# Altium PCB BACKUP_POWER.PcbDoc (part 1 of 2)
Units mm, origin at the board's own origin, x right, y up, seen from the top; angles counter-clockwise.
Board outline 100 x 100 mm, 2 copper layers (Top Layer, Bottom Layer); 154 components, 92 nets, 415 pads, 323 vias.
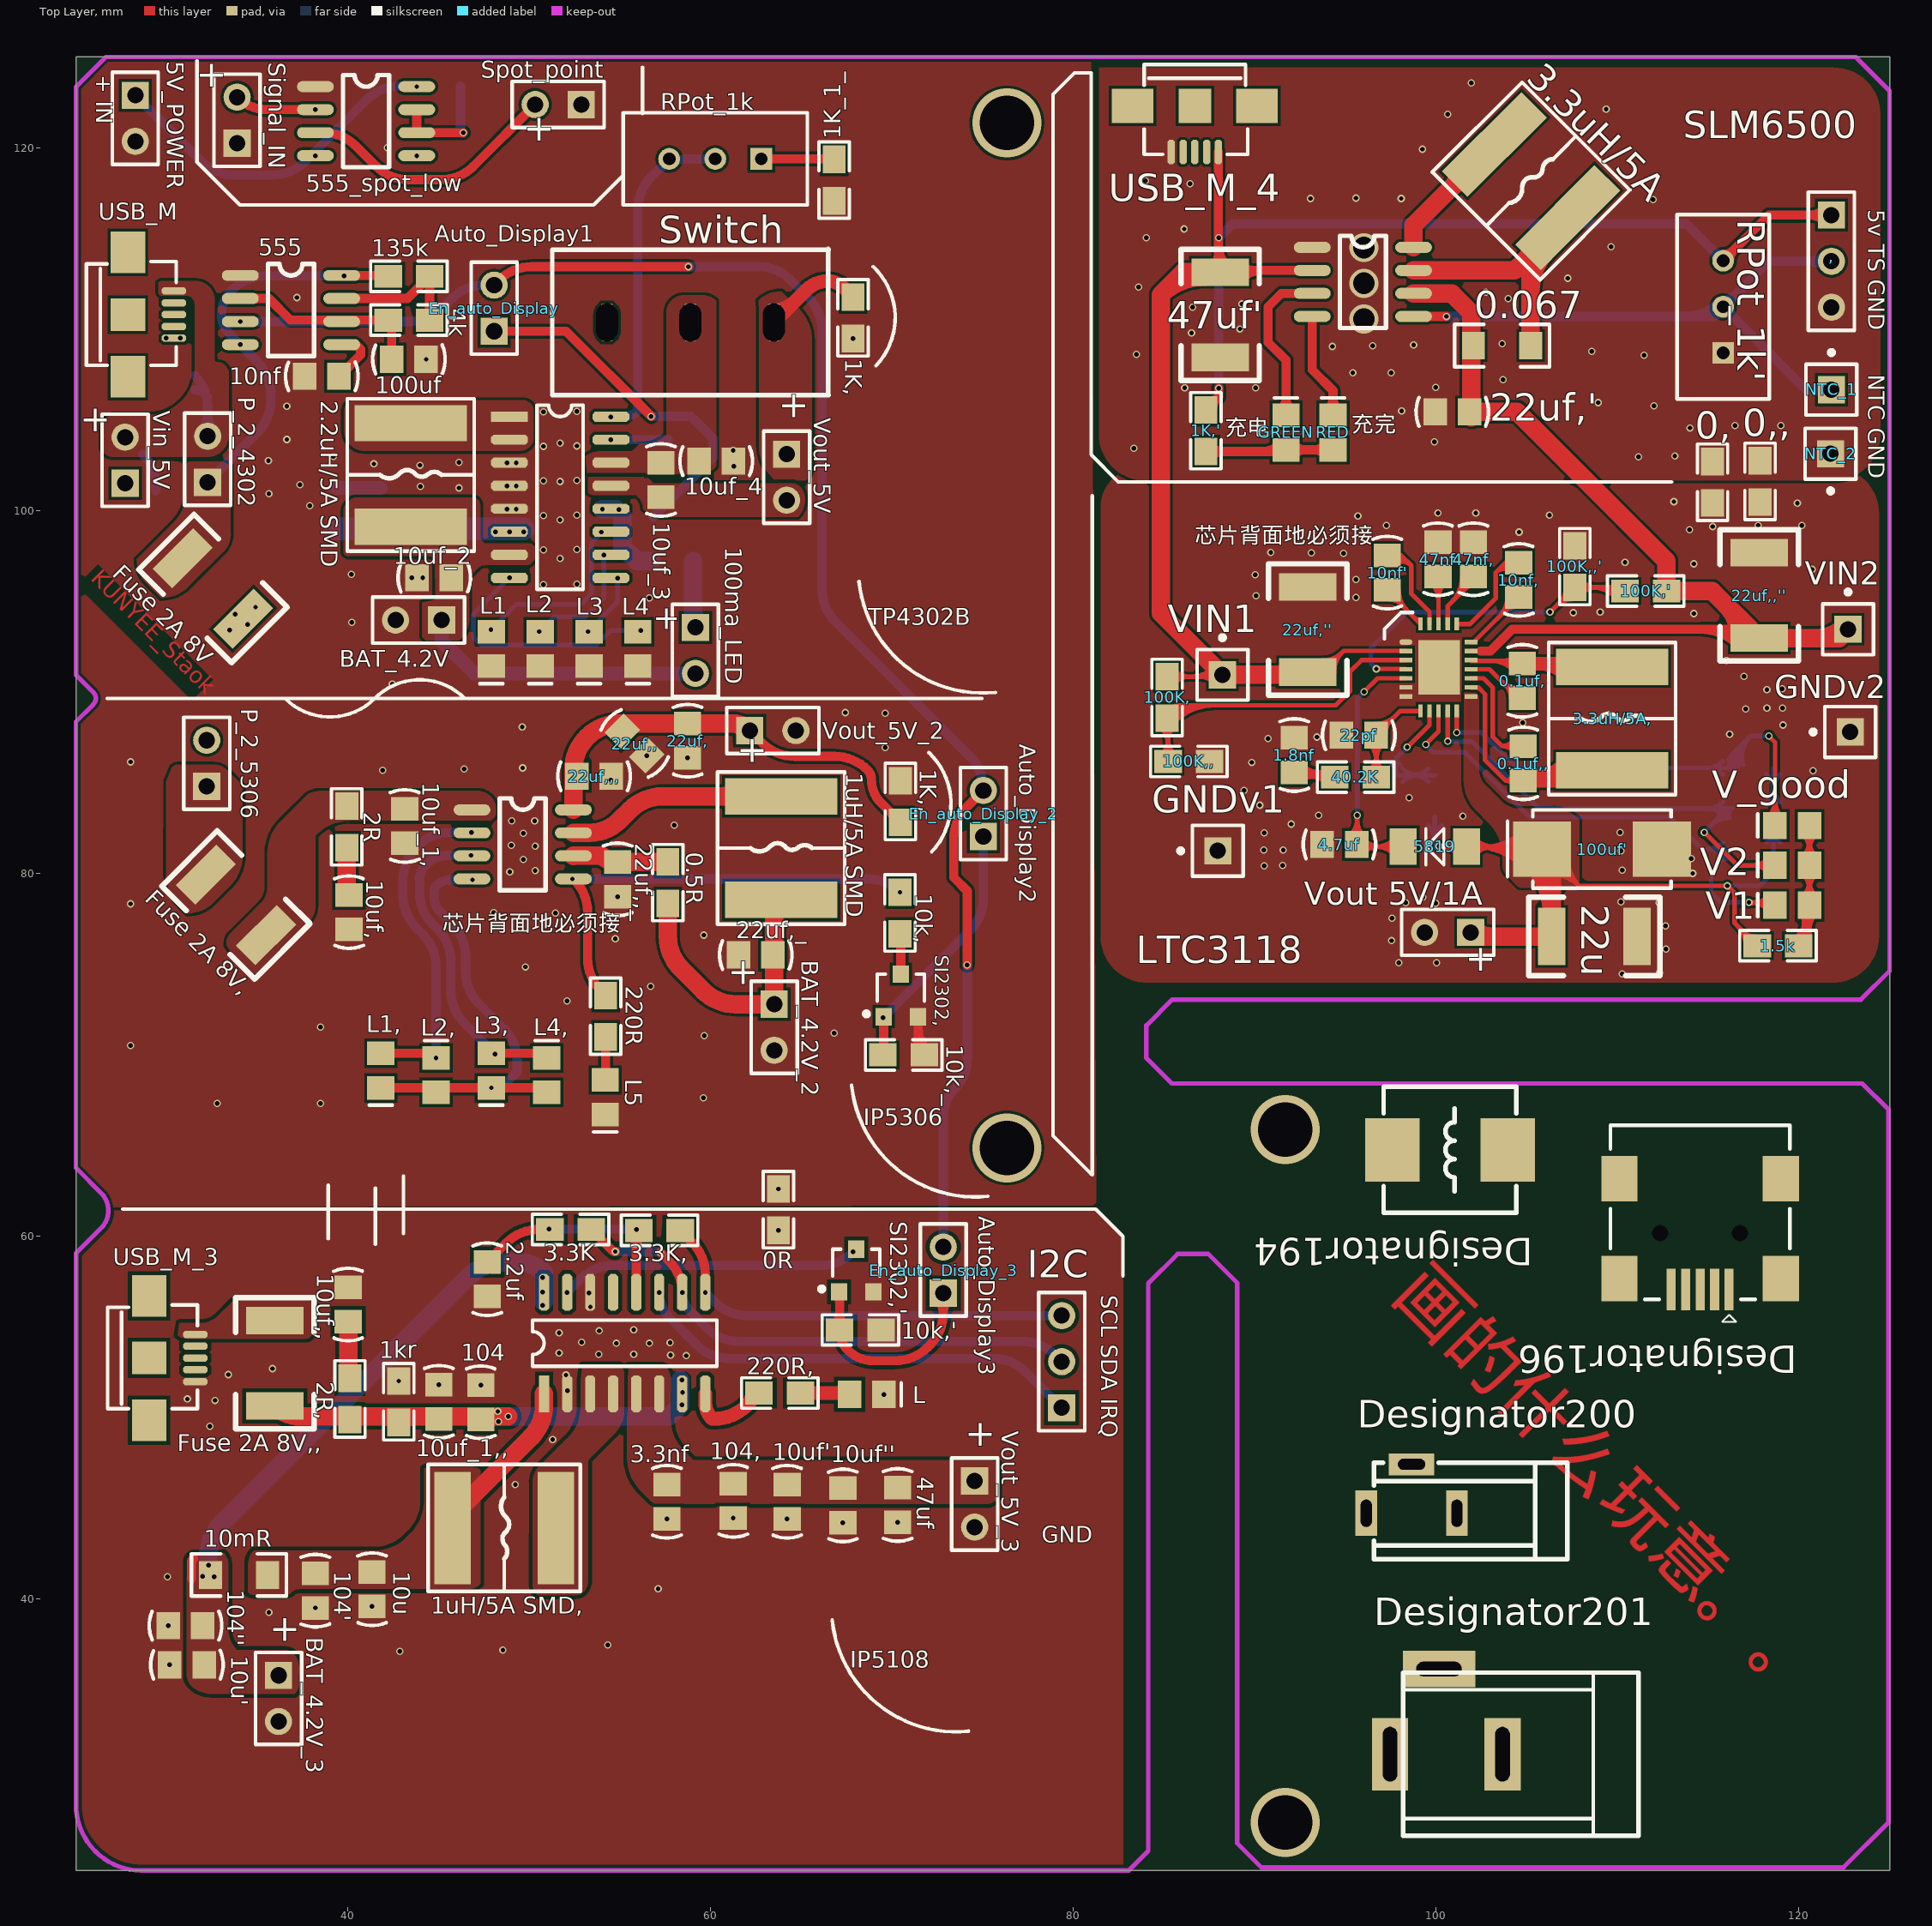
[diagram p0: Top Layer view]
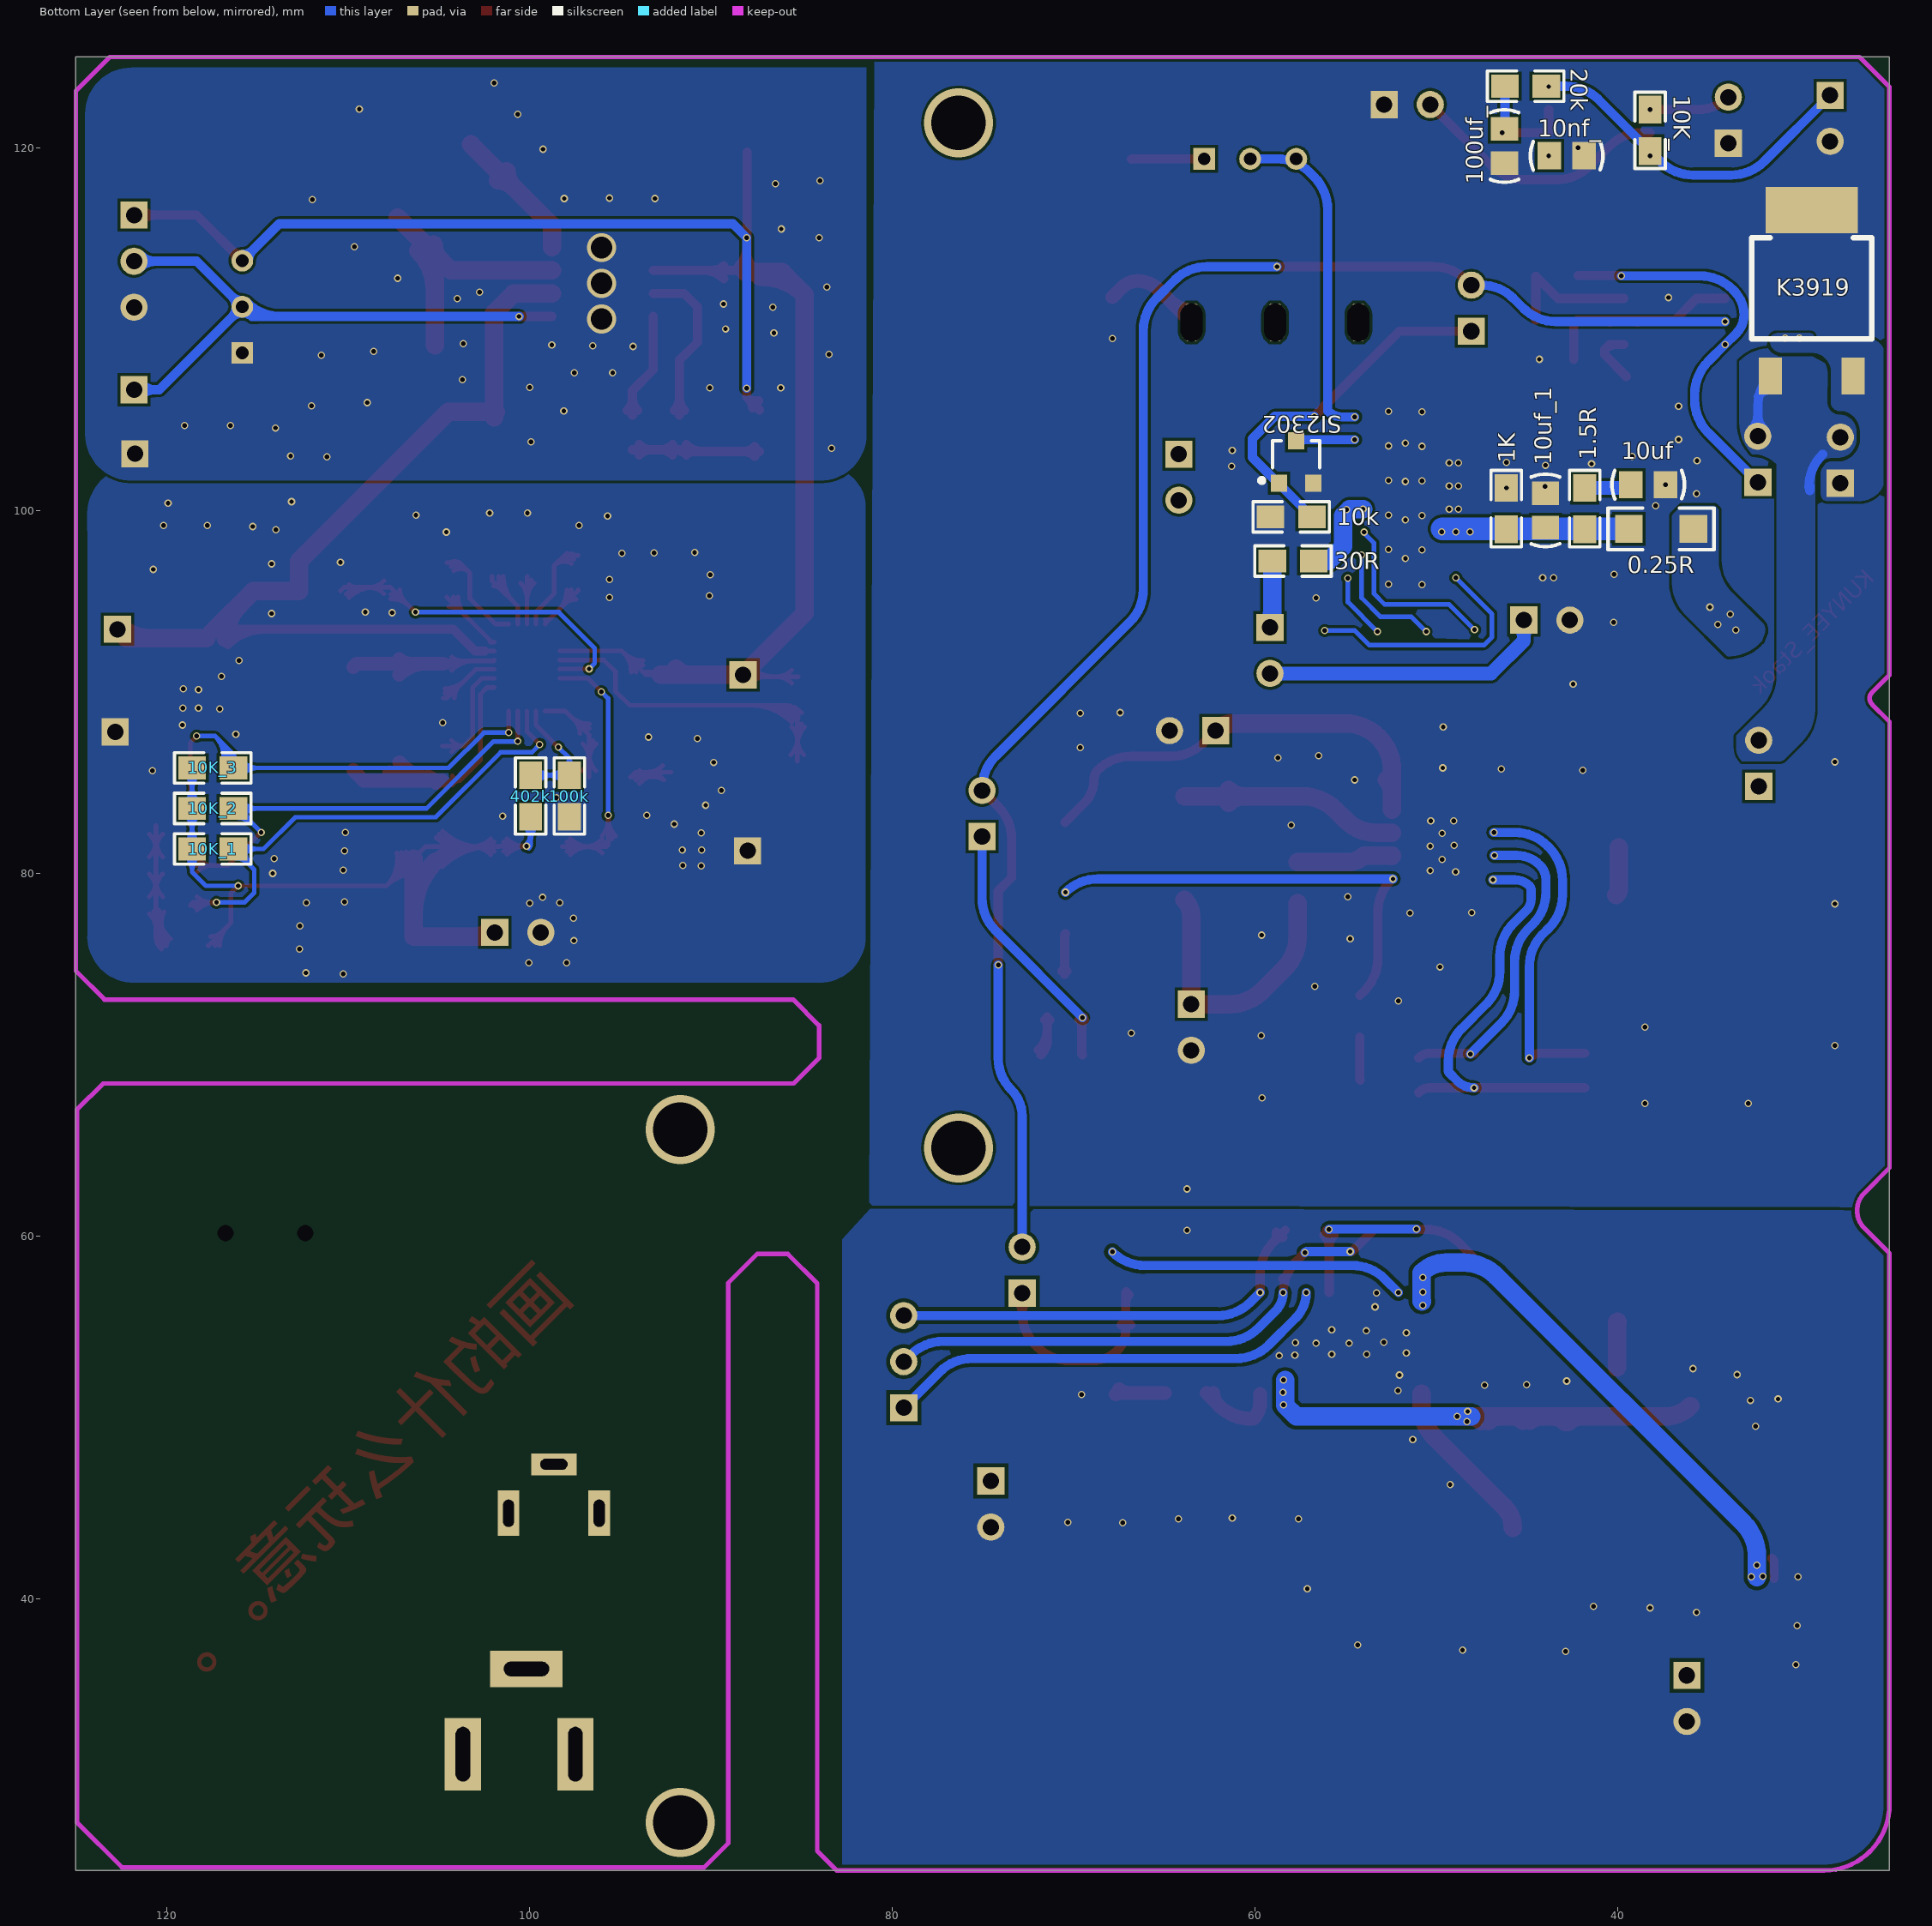
[diagram p1: Bottom Layer view, seen from below]

## Layer stack, top to bottom
Top Layer: signal copper 0.0356
Dielectric: dielectric 0.32, FR-4, Dk 4.8
Bottom Layer: signal copper 0.0356

## Board outline
25,25 25,125 125,125 125,25

## Design rules (kind name [scope] priority, off if disabled: settings)
Clearance [All] p1: gap=0.152
PlaneConnect [All] p1: planeconnectstyle=Direct reliefexpansion=0.508 reliefentries=4 reliefconductorwidth=0.254 reliefairgap=0.254
PolygonConnect [All] p1: connectstyle=Direct reliefconductorwidth=0.254 reliefentries=4 polygonreliefangle="90 Angle"
RoutingVias [All] p1: holewidth=0.711 width=1.27 viastyle="Through Hole" minholewidth=0.254 minwidth=0.406 maxholewidth=0.711 maxwidth=1.27
SilkscreenOverComponentPads [All] p1: minsilkscreentomaskgap=0.254
SolderMaskExpansion [All] p1: expansion=0.152
Width [All] p1: maxlimit=1.27 minlimit=0.254 preferedwidth=0.635
26 further rules are at their usual default settings.

## Classes and differential pairs
component class BACKUP_POWER_充电升压俩芯片: 0, 0,, 0.1uf, 0.1uf,, 0.067 1.5k 1.8nf 1K,' 3.3uH/5A 3.3uH/5A, 4.7uf 10K_1 10K_2 10K_3 10nf' 10nf, 22pf 22u 22uf,' 22uf,'' 22uf,,'' 40.2K 47nf 47nf, 47uf' 100k 100K, 100K,' 100K,, 100K,,' 100uf' 402k 5819 , GNDv1 GNDv2 GREEN LTC3118 NTC_1 NTC_2 RED RPot_1k' SLM6500 USB_M_4 V1 V2 V_good VIN1 VIN2 "Vout 5V/1A"
component class BACKUP_POWER: 0.5R 0.25R 1.5R 1K 1K, 1K,, 1K_1_ "1uH/5A SMD" "2.2uH/5A SMD" 2R 4k 5V_POWER 10k 10k, 10k,_ 10K_ 10nf 10nf_ 10uf 10uf, 10uf_1 10uf_1, 10uf_2 10uf_3 10uf_4 20k 22uf, 22uf,, 22uf,,, 22uf,,_ 22uf,_ 30R 100ma_LED 100uf 100uf_ 135k 220R 555 555_spot_low BAT_4.2V BAT_4.2V_2 En_auto_Display En_auto_Display_2 "Fuse 2A 8V" "Fuse 2A 8V," IP5306 K3919 L1 L1, L2 L2, L3 L3, L4 L4, L5 P_2_4302 P_2_5306 RPot_1k SI2302 SI2302, Signal_IN Spot_point Switch TP4302B USB_M Vin_5V Vout_5V Vout_5V_2
component class BACKUP_POWER_小平板用: 0R 1kr "1uH/5A SMD," 2.2uf 2R, 3.3K 3.3K, 3.3nf 10k,' 10mR 10u 10u' 10uf' 10uf'' 10uf,, 10uf_1,, 47uf 104 104' 104'' 104, 220R, BAT_4.2V_3 En_auto_Display_3 "Fuse 2A 8V,," I2C IP5108 L SI2302,' USB_M_3 Vout_5V_3

## Components (designator, comment, footprint, x,y, rotation, side; value= is the part's Value field where it differs from the comment)
0, "Res2" 0805A 115.24,102.692 r270 top
0,, "Res2" 0805A 117.856,102.743 r270 top
0.1uf, "Cap" C-RAD-0805 104.75,90.602 r90 top
0.1uf,, "Cap" C-RAD-0805 104.8,86.055 r270 top
0.5R "Res2" 0805A 57.633,78.334 r90 top
0.25R "Res2" 1206 37.592,98.984 r180 bottom
0.067 "Res2" 1206R 103.632,109.093 r0 top
0R "Res2" 0805A 63.729,62.586 r270 top
1.5k "Res2" 0805A 117.704,75.997 r0 top
1.5R "Res2" 0805A 41.808,101.24 r270 bottom
1.8nf "Cap" C-RAD-0805 92.177,86.512 r270 top
1K "Res2" 0805A 46.126,101.24 r270 bottom
1K, "Res2" 0805A 67.843,109.474 r90 top
1K,' "Res2" 0805A 87.3,105.537 r270 top
1K,, "Res2" 0805A 70.46,85.09 r270 top
1K_1_ "Res2" 0805A 66.802,117.069 r90 top
1kr "Res2" 0805A 42.799,51.994 r270 top
"1uH/5A SMD" "Inductor" "6 X 6-L" 63.881,81.382 r270 top
"1uH/5A SMD," "Inductor" "6 X 6-L" 48.616,43.891 r180 top
2.2uf "Cap" C-RAD-0805 47.676,57.607 r90 top
"2.2uH/5A SMD" "Inductor" "6 X 6-L" 43.459,101.956 r270 top
2R "Res2" 0805A 39.929,81.407 r90 top
2R, "Res2" 0805A 40.107,52.146 r270 top
3.3K "Res2" 0805A 51.13,60.35 r0 top
3.3K, "Res2" 0805A 56.032,60.3 r0 top
3.3nf "Cap" C-RAD-0805 57.582,45.339 r90 top
3.3uH/5A "Inductor" "6 X 6-L" 105.232,118.161 r315 top
3.3uH/5A, "Inductor" "6 X 6-L" 109.703,88.519 r270 top
4.7uf "Cap" C-RAD-0805 94.666,81.585 r180 top
4k "Res2" 0805A 42.215,110.49 r0 top
5V_POWER "Header 2" HDR1X2 28.27,122.885 r270 top
10k "Res2" 0805A 56.845,99.644 r0 bottom
10k, "Res2" 0805A 70.434,78.943 r270 top
10k,' "Res2" 0805A 67.107,54.813 r0 top
10k,_ "Res2" 0805A 69.494,69.977 r0 top
10K_ "Res2" 0805A 38.202,122.098 r270 bottom
10K_1 "Res2" 0805A 118.593,81.331 r180 bottom
10K_2 "Res2" 0805A 118.593,83.566 r180 bottom
10K_3 "Res2" 0805A 118.593,85.801 r180 bottom
10mR "Res2" 1206R 33.985,41.3 r180 top
10nf "Cap" C-RAD-0805 38.557,107.391 r0 top
10nf' "Cap" C-RAD-0805 97.307,96.571 r270 top
10nf, "Cap" C-RAD-0805 104.546,96.164 r90 top
10nf_ "Cap" C-RAD-0805 42.799,119.558 r0 bottom
10u "Cap" C-RAD-0805 41.326,40.513 r270 top
10u' "Cap" C-RAD-0805 31.115,36.347 r180 top
10uf "Cap" C-RAD-0805 38.303,101.422 r180 bottom
10uf' "Cap" C-RAD-0805 64.211,45.339 r270 top
10uf'' "Cap" C-RAD-0805 67.285,45.136 r270 top
10uf, "Cap" C-RAD-0805 40.056,77.851 r270 top
10uf,, "Cap" C-RAD-0805 40.005,56.21 r90 top
10uf_1 "Cap" C-RAD-0805 43.967,100 r90 bottom
10uf_1, "Cap" C-RAD-0805 43.129,82.601 r270 top
10uf_1,, "Cap" C-RAD-0805 45.009,50.851 r90 top
10uf_2 "Cap" C-RAD-0805 44.755,96.291 r180 top
10uf_3 "Cap" C-RAD-0805 57.252,101.676 r270 top
10uf_4 "Cap" C-RAD-0805 60.3,102.718 r0 top
20k "Res2" 0805A 46.203,123.393 r180 bottom
22pf "Cap" C-RAD-0805 95.733,87.605 r0 top
22u "Cap" 1812 106.35,74.6 r0 top
22uf, "Cap" C-RAD-0805 58.725,87.3 r270 top
22uf,' "Cap" C-RAD-0805 100.889,105.435 r0 top
22uf,'' "Cap" 1812 94.818,91.059 r90 top
22uf,, "Cap" C-RAD-0805 55.804,87.147 r315 top
22uf,,'' "Cap" 1812 119.71,92.939 r90 top
22uf,,, "Cap" C-RAD-0805 53.569,85.344 r0 top
22uf,,_ "Cap" C-RAD-0805 54.864,79.654 r270 top
22uf,_ "Cap" C-RAD-0805 62.484,75.489 r180 top
30R "Res2" 0805A 59.03,97.206 r180 bottom
40.2K "Res2" 0805A 94.412,85.293 r0 top
47nf "Cap" C-RAD-0805 100.101,97.307 r270 top
47nf, "Cap" C-RAD-0805 102.057,97.307 r270 top
47uf "Cap" C-RAD-0805 70.307,45.161 r270 top
47uf' "Cap" 1812 86.182,113.157 r270 top
100k "Res2" 0805A 97.79,83.109 r90 bottom
100K, "Res2" 0805A 85.166,88.544 r90 top
100K,' "Res2" 0805A 110.414,95.555 r0 top
100K,, "Res2" 0805A 87.503,86.157 r180 top
100K,,' "Res2" 0805A 107.645,98.044 r270 top
100ma_LED "Header 2" HDR1X2 59.157,93.548 r270 top
100uf "Cap" C-RAD-0805 43.358,108.331 r180 top
100uf' "Cap" CAP-7343 109.144,81.331 r0 top
100uf_ "Cap" C-RAD-0805 46.228,120.091 r90 bottom
104 "Cap" C-RAD-0805 47.32,50.825 r90 top
104' "Cap" C-RAD-0805 38.202,40.437 r270 top
104'' "Cap" C-RAD-0805 31.039,38.506 r180 top
104, "Cap" C-RAD-0805 61.239,45.39 r270 top
135k "Res2" 0805A 42.215,112.903 r0 top
220R "Res2" 0805A 54.204,70.968 r90 top
220R, "Res2" 0805A 64.948,51.333 r180 top
402k "Res2" 0805A 99.924,85.395 r270 bottom
555 "" SOP8 36.982,111.049 r0 top
555_spot_low "" SOP8 41.123,121.463 r0 top
5819 "Diode" DIODE-1206 101.676,81.458 r180 top
, "Header 3" HDR1X3 121.793,116.281 r270 top
BAT_4.2V "B" HDR1X2 45.161,93.955 r180 top
BAT_4.2V_2 "B" HDR1X2 63.5,72.771 r270 top
BAT_4.2V_3 "B" HDR1X2 36.17,35.763 r270 top
Designator194 "Comment" L-SMD-0630 100.762,64.745 r180 top
Designator196 "Comment" USB-MINI-A 114.554,60.147 r180 top
Designator200 "Comment" DC-002 101.143,44.704 r0 top
Designator201 "Comment" DC-005 103.657,31.42 r0 top
En_auto_Display "Header 2" HDR1X2 48.057,109.88 r90 top
En_auto_Display_2 "Header 2" HDR1X2 75.032,82.017 r90 top
En_auto_Display_3 "Header 2" HDR1X2 72.822,56.845 r90 top
"Fuse 2A 8V" "Fuse 2" 1812F 30.886,97.358 r315 top
"Fuse 2A 8V," "Fuse 2" 1812F 32.156,79.908 r315 top
"Fuse 2A 8V,," "Fuse 2" 1812F 35.966,55.321 r270 top
GNDv1 "1PIN" PIN1 87.96,81.229 r90 top
GNDv2 "1PIN" PIN1 122.834,87.782 r90 top
GREEN "LED0" LED_0805 91.719,104.292 r90 top
I2C "Header 3" HDR1X3 79.35,50.521 r90 top
IP5108 "" SOP16 54.788,54.026 r0 top
IP5306 "" SOP8 49.759,81.585 r0 top
K3919 "LR7843" TO-252 31.572,107.417 r180 bottom
L "LED0" LED_0805 68.605,51.257 r0 top
L1 "LED0" LED_0805 47.904,92.354 r270 top
L1, "LED0" LED_0805 41.808,69.112 r270 top
L2 "LED0" LED_0805 50.597,92.354 r270 top
L2, "LED0" LED_0805 44.856,68.859 r90 top
L3 "LED0" LED_0805 53.289,92.354 r270 top
L3, "LED0" LED_0805 47.904,69.112 r270 top
L4 "LED0" LED_0805 55.982,92.354 r270 top
L4, "LED0" LED_0805 50.952,68.859 r90 top
L5 "LED0" LED_0805 54.179,67.64 r270 top
LTC3118 "LTC3118 UFD/QFN24" "QFN24 7+5" 100.33,91.491 r0 top
NTC_1 "1PIN" PIN1 121.793,106.655 r0 top
NTC_2 "1PIN" PIN1 121.742,103.124 r180 top
P_2_4302 "Header 2" HDR1X2 32.258,101.549 r90 top
P_2_5306 "Header 2" HDR1X2 32.207,84.785 r90 top
RED "LED0" LED_0805 94.31,104.292 r90 top
RPot_1k "RPot" VR_A1 60.249,119.38 r180 top
RPot_1k' "RPot" VR_A1 115.824,111.227 r90 top
SI2302 "LR7843" SOT-23 57.709,102.667 r180 bottom
SI2302, "LR7843" SOT-23 70.485,73.254 r0 top
SI2302,' "LR7843" SOT-23 68.021,58.09 r0 top
Signal_IN "Header 2" HDR1X2 33.884,120.244 r90 top
SLM6500 "SLM6500" SOP8 96.088,112.598 r0 top
Spot_point "Header 2" HDR1X2 52.857,122.377 r180 top
Switch "Header 3" SWITCH_A1 54.28,110.363 r0 top
TP4302B "" SOP16 51.638,101.194 r270 top
USB_M "USB_M" USB_MICRO 27.864,110.795 r270 top
USB_M_3 "USB_M" USB_MICRO 29.032,53.264 r270 top
USB_M_4 "USB_M" USB_MICRO 86.69,122.301 r180 top
V1 "LED0" LED_0805 119.634,78.232 r180 top
V2 "LED0" LED_0805 119.634,80.429 r180 top
V_good "LED0" LED_0805 119.634,82.626 r180 top
VIN1 "1PIN" PIN1 88.214,90.932 r0 top
VIN2 "1PIN" PIN1 122.707,93.447 r0 top
Vin_5V "Header 2" HDR1X2 27.711,101.498 r90 top
"Vout 5V/1A" "Header 2" HDR1X2 101.905,76.733 r180 top
Vout_5V "Header 2" HDR1X2 64.186,103.099 r270 top
Vout_5V_2 "Header 2" HDR1X2 62.154,87.859 r0 top
Vout_5V_3 "Header 2" HDR1X2 74.549,46.482 r270 top

## Footprints (in the part's own frame and the unit in brackets; to place one, negate y for a bottom-side part, rotate by r counter-clockwise, add the part's x,y. Pads: shape width x height; smd on the part's side, far side on the other; paste and mask are expansions set on the pad)
"6 X 6-L" [mm]
  rect 2x6.2 smd: 1(-2.85,0) 2(2.85,0)
  silkscreen extent -4.2,-3.5 4.2,3.5
0805A [mil]
  rect 60x50 smd: 1(0,0) 2(90,0)
  silkscreen extent -38,-33 128,33
1206 [mil] "贴?"
  rect 60x60 smd: 1(-70,0) 2(70,0)
  silkscreen extent -115,-45 115,45, body extent -75,-35 75,35, height 39
1206R [mil]
  rect 50x60 smd: 1(-62,0) 2(62,0)
  silkscreen extent -103,-46 103,46
1812 [mil]
  rect 60x125 smd: 1(1,75) 2(186,75)
  silkscreen extent -49,-10 236,160
1812F [mil]
  rect 60x125 smd: 1(0,0) 2(185,0)
  silkscreen extent -50,-85 235,85, body extent -1,-63 189,64, height 52
C-RAD-0805 [mm]
  rect 1.3x1.5 smd: 1(-0.95,0) 2(0.95,0)
  silkscreen extent -2,-0.79 2,0.79, body extent -1.27,-0.64 1.27,0.64, height 0.9
CAP-7343 [mm]
  rect 3.2x3.05 smd: 1(-3.302,0) 2(3.302,0)
  silkscreen extent -5.21,-2.16 3.81,2.16, body extent -3.68,-1.91 3.68,1.91, height 2.95
DC-002 [mm]
  rect 1.2x2.5 hole 0.6 slot 1.5 at 90 deg: 1(-5,0) 2(0,0)
  rect 2.5x1.2 hole 0.6 slot 1.5 at 0 deg: 3(-2.5,2.7)
  silkscreen extent -4.57,-2.54 6.1,2.79, body extent -5.3,-2.5 6,2.85, height 7.3
DC-005 [mm]
  rect 2x4 hole 0.8 slot 3 at 90 deg: 1(-6.2,0) 2(0,0)
  rect 4x2 hole 0.8 slot 2.5 at 0 deg: 3(-3.5,4.7)
  silkscreen extent -5.48,-4.5 7.5,4.5, body extent -6.55,-4.5 7.5,4.8, height 11.2
DIODE-1206 [mm]
  rect 1.5x2 smd: 1(0,0) 2(3.5,0)
  silkscreen extent 1.25,-1 2.25,1
HDR1X2 [mm] "Connector; Header; 2 Position"
  rect 1.5x1.5 hole 0.9: 1(0,0)
  round 1.5 hole 0.9: 2(2.54,0)
  silkscreen extent -1.27,-1.27 3.81,1.27
HDR1X3 [mm]
  rect 1.5x1.5 hole 0.9: 1(0,0)
  round 1.5 hole 0.9: 2(2.54,0) 3(5.08,0)
  silkscreen extent -1.27,-1.27 6.35,1.27
L-SMD-0630 [mm]
  rect 3x3.5 smd: 1(-3.175,0) 2(3.175,0)
  silkscreen extent -3.66,-3.48 3.66,3.48, body extent -3.47,-3.3 3.47,3.3, height 3.05
LED_0805 [mm]
  rect 1.3x1.5 smd: 1(-0.95,0) 2(0.95,0)
  silkscreen extent 1.91,-0.63 1.91,0.64
PIN1 [mm]
  rect 1.5x1.5 hole 0.9: 1(0,0)
  silkscreen extent -1.4,-1.4 1.4,2.17
"QFN24 7+5" [mm]
  oval 0.7x0.3 smd mask+0: 1(-2,1.25)
  rect 0.7x0.25 smd mask+0: 2(-2,0.75) 3(-2,0.25) 4(-2,-0.25) 5(-2,-0.75) 6(-2,-1.25) 7(-2,-1.75) 13(1.6,-1.75) 14(1.6,-1.25) 15(1.6,-0.75) 16(1.6,-0.25) 17(1.6,0.25) 18(1.6,0.75) 19(1.6,1.25)
  rect 0.25x0.7 smd mask+0: 8(-1.2,-2.55) 9(-0.7,-2.55) 10(-0.2,-2.55) 11(0.3,-2.55) 12(0.8,-2.55) 20(0.8,2.25) 21(0.3,2.25) 22(-0.2,2.25) 23(-0.7,2.25) 24(-1.2,2.25)
  rect 2.3x3 smd paste+0 mask+0: 25(-0.175,-0.15)
  silkscreen extent -3.17,1.42 -1.63,2.88
SOP8 [mil]
  oval 80x24 smd: 1(-115,75) 2(-115,25) 3(-115,-25) 4(-115,-75) 5(105,-75) 6(105,-25) 7(105,25) 8(105,75)
  silkscreen extent -55,-100 45,100, body extent -126,-95 110,97, height 67
SOP16 [mil]
  rect 22x80 smd: 1(-156.57,-107.68)
  oct 22x80 smd: 2(-106.57,-107.68) 3(-56.57,-107.68) 4(-6.57,-107.68) 5(43.43,-107.68) 6(93.43,-107.68) 7(143.43,-107.68) 8(193.43,-107.68) 9(193.43,112.32) 10(143.43,112.32) 11(93.43,112.32) 12(43.43,112.32) 13(-6.57,112.32) 14(-56.57,112.32) 15(-106.57,112.32) 16(-156.57,112.32)
  silkscreen extent -182,-48 218,52
SOT-23 [mm]
  rect 0.9x0.95 smd: 1(-0.95,-1.175) 2(0.95,-1.175) 3(0,1.175)
  silkscreen extent -2.03,-1.14 1.3,1.18
SWITCH_A1 [mm] "Ť?"
  oct 1x2.1 hole 1.2 slot 2.1 at 90 deg: 1(0,0) 2(4.6,0) 3(9.2,0)
  silkscreen extent -3.02,-4 12.22,4.06
TO-252 [mil]
  rect 50x80 smd: 1(0,0) 3(180,0)
  rect 200x100 smd: 2(90,360)
  silkscreen extent -40,80 220,300
USB-MINI-A [mm] "M"
  rect 0.5x2.3 smd: 1(-1.6,3.108) 2(-0.8,3.108) 3(0,3.108) 4(0.8,3.108) 5(1.6,3.108)
  rect 2x2.5 smd: 5(-4.45,2.5) 5(-4.45,-3) 5(4.45,2.5) 5(4.45,-3)
  round 0.6 hole 0.9 unplated: MH1(2.2,0) MH2(-2.2,0)
  silkscreen extent -4.95,-5.95 4.95,4.89, body extent -4.75,-6 4.75,3.7, height 3.95
USB_MICRO [mm]
  oct 0.4x1.35 smd: 1(-1.3,2.54) 2(-0.65,2.54) 3(0,2.54) 4(0.65,2.54) 5(1.3,2.54)
  rect 2.286x1.9 smd: 6(3.429,0) 7(-3.429,0)
  rect 1.8x1.9 smd: 8(0,0)
  silkscreen extent -2.92,-2.29 2.79,2.67
VR_A1 [mm]
  rect 1.2x1.2 hole 0.7: 1(-2.54,0)
  round 1.2 hole 0.7: 2(0,0) 3(2.54,0)
  silkscreen extent -5.08,-2.54 5.08,2.54, body extent -5.08,-2.54 5.08,2.54, height 10.5

## Part data
0.5R 0.25R 1.5R 1K 1K, 1K,, 1K_1_ 2R 4k 10k 10k, 10k,_ 10K_ 20k 30R 135k 220R: "Resistor"
"1uH/5A SMD" "2.2uH/5A SMD": "Ind"
5V_POWER 100ma_LED En_auto_Display En_auto_Display_2 En_auto_Display_3 P_2_4302 P_2_5306 Signal_IN Spot_point Vin_5V "Vout 5V/1A" Vout_5V Vout_5V_2 Vout_5V_3: "Header, 2-Pin"
10nf 10nf_ 10uf 10uf, 10uf_1 10uf_1, 10uf_2 10uf_3 10uf_4 22uf, 22uf,, 22uf,,, 22uf,,_ 22uf,_ 100uf 100uf_: "Capacitor"
, I2C Switch: "Header, 3-Pin"
"Fuse 2A 8V" "Fuse 2A 8V,": "Fuse"
K3919 SI2302 SI2302,: library part NMOS-2, "N-Channel Power MOSFET"
L1 L1, L2 L2, L3 L3, L4 L4, L5: "发?"
RPot_1k: "精?"
SI2302,': library part NMOS-2, "N-Chan"
USB_M: "MicroUSB接?"
USB_M_3: library part US

## Via types
v1: diameter 0.406, hole 0.254, Top Layer to Bottom Layer, tented both sides, 316 vias
v2: diameter 3.8, hole 3, Top Layer to Bottom Layer, tented both sides, 4 vias
v3: diameter 1.6, hole 1.2, Top Layer to Bottom Layer, tented both sides, 3 vias

## Nets (pads, with @x,y where several pads share a name; then routed paths per layer and width w, separated by ;. In a path a pad name is that pad's centre, name@x,y a point inside that pad or via, vN(x,y) a via of type N, cw(c..) or ccw(c..) an arc to the next point about the centre after c; other vN are vias at no path point)
5+: 5V_POWER.1 10K_.2 20k.2 555_spot_low.4 555_spot_low.8 | length 19.9
  Bottom Layer w0.508: 5V_POWER.1@28.27,122.885 31.92,119.235 ccw(c33.717,121.031) 33.717,118.491 35.829,118.491 ccw(c35.829,121.031) 37.625,119.235 10K_.2@38.202,119.812 41.039,122.649 cw(c42.835,120.853) 42.835,123.393 20k.2@43.917,123.393 ; 10K_.2@37.855,119.465 cw(c38.202,119.118) 10K_.2@38.202,119.609 ; 10K_.2@38.151,119.558 cw(c38.641,119.558) 10K_.2@38.294,119.905
  other v1: 38.202,119.558 43.79,123.368
5V_IN: K3919.1 P_2_4302.2 P_2_5306.2 USB_M.1 Vin_5V.2 | length 8.5
  Bottom Layer w0.508: 28.677,103.099 28.695,103.081 cw(c26.899,101.284) 29.439,101.284 ; 29.388,101.092 29.388,101.356 ; K3919.1@31.571,106.655 cw(c31.57,105.889) 32.233,106.272 ; K3919.1@31.572,107.417 cw(c29.917,105.761) 32.258,105.761 P_2_4302.2@32.258,104.089 ; P_2_4302.2@31.907,104.44 ccw(c31.061,105.287) 32.258,105.287 ccw(c33.455,105.287) P_2_4302.2@32.609,104.44
BAT: 10uf_2.1 100ma_LED.2 "2.2uH/5A SMD.2" BAT_4.2V.1 TP4302B.7 | length 19.3
  Top Layer w0.762: 43.459,99.106 45.497,99.106
  Bottom Layer w0.762: BAT_4.2V.1@44.9,93.694 cw(c44.27,93.064) 45.161,93.064 cw(c46.052,93.064) BAT_4.2V.1@45.422,93.694 ; BAT_4.2V.1@45.161,93.955 45.161,92.812 46.965,91.008 100ma_LED.2@59.157,91.008
BST1: 0.1uf,.1 LTC3118.16 | length 6.2
  Top Layer w0.254: LTC3118.16@101.93,91.241 102.942,91.241 104.531,89.652 104.75,89.652 ; 103.555,90.628 ccw(c104.65,91.723) 104.65,90.175 ; 103.841,90.342 cw(c103.15,89.652) 104.127,89.652 ; 103.988,90.195 ccw(c104.65,90.856) 104.65,89.921
BST2: 0.1uf,,.1 LTC3118.15 | length 7.5
  Top Layer w0.254: LTC3118.15@101.93,90.741 102.604,90.741 103.124,90.221 103.124,87.503 103.622,87.005 ; 104.29,86.681 ccw(c103.622,86.155) 103.622,87.005 ; 104.29,87.329 cw(c103.622,87.856) 103.622,87.005 ; 104.8,87.005 103.622,87.005
CSIN: 10mR.1 10u.1 104'.1 "1uH/5A SMD,.2" IP5108.1 | length 9.3
  Top Layer w1.016: 45.766,43.891 cw(c47.409,43.891) 46.247,45.053 50.067,48.873 ccw(c48.271,50.669) 50.811,50.669 IP5108.1@50.811,51.291
DISPLAY: 555.3 En_auto_Display.2 En_auto_Display_2.2 En_auto_Display_3.2 | length 90.1
  Top Layer w0.508: En_auto_Display.2@48.057,112.42 48.329,112.692 cw(c50.125,110.896) 50.125,113.436 v1(58.776,113.436) ; v1(74.143,74.93) 74.143,79.019 73.399,79.763 73.399,81.872 cw(c75.939,81.872) 74.143,83.668 En_auto_Display_2.2@75.032,84.557
  Bottom Layer w0.508: v1(34.061,110.414) 43.398,110.414 ccw(c43.398,112.954) 45.194,111.158 45.713,111.676 cw(c47.509,109.88) 47.509,112.42 En_auto_Display.2@48.057,112.42 ; v1(58.776,113.436) 62.626,113.436 cw(c62.626,110.896) 64.422,112.692 65.398,111.717 cw(c63.602,109.92) 66.142,109.92 66.142,95.642 ccw(c68.682,95.642) 66.886,93.846 74.288,86.444 cw(c72.492,84.647) 75.032,84.647 En_auto_Display_2.2@75.032,84.557 ; En_auto_Display_3.2@72.822,59.385 72.822,66.6 cw(c74.903,66.6) 73.431,68.072 ccw(c71.714,69.789) 74.143,69.789 v1(74.143,74.93)
FB: 100k.2 402k.1 LTC3118.9 | length 11.2
  Top Layer w0.254: v1(98.4,86.944) 99.63,88.175 LTC3118.9@99.63,88.941
  Bottom Layer w0.254: 100k.2@97.567,85.978 ccw(c97.394,86.335) 97.79,86.335 ; 100k.2@98.013,85.978 cw(c98.186,86.335) 97.79,86.335 ; 100k.2@98.149,85.036 cw(c99.016,84.168) 99.016,85.395 cw(c99.016,86.621) 100k.2@98.149,85.754 ; v1(98.4,86.944) 97.79,86.335 ; 402k.1@99.564,85.036 ccw(c98.697,84.168) 98.697,85.395 ccw(c98.697,86.621) 402k.1@99.564,85.754 ; 402k.1@99.924,85.395 100k.2@97.79,85.395 97.79,86.335
GND: 0R.1 1K,,.1 1K,.1 1K.1 1K_1_.1 5V_POWER.2 10k,_.2 10k.2 10nf.1 10nf_.1 10uf,.2 10uf.2 10uf_1,.2 10uf_1.2 10uf_2.2 10uf_4.2 22uf,,,.2 22uf,,.2 22uf,,_.2 22uf,.2 22uf,_.2 100uf.1 100uf_.1 555.1 555_spot_low.1 BAT_4.2V.2 BAT_4.2V_2.2 K3919.2 L1.2 L2.2 L3.2 L4.2 L5.2 SI2302,.2 SI2302.2 Signal_IN.1 Spot_point.1 TP4302B.3 TP4302B.4 TP4302B.5 Vout_5V_2.2 | length 4.9
  Top Layer w0.508: 71.296,71.915 cw(c70.962,71.58) 71.435,71.58 cw(c71.908,71.58) 71.574,71.915 ; 71.435,71.424 ccw(c73.1,71.424) 71.923,70.246 ; 71.435,72.079 71.435,70.811 ; 71.775,70.338 cw(c71.934,70.811) 71.435,70.811 ; 71.78,69.977 cw(c72.614,70.811) 71.435,70.811
  other v1: 63.729,62.586 32.791,67.31 38.481,67.31 59.588,67.615 28.016,70.485 59.639,71.044 66.802,71.171 38.481,71.501 52.07,72.949 56.693,73.762 49.784,74.828 54.737,76.378 59.614,76.581 51.435,77.8 48.031,77.826 28.016,78.308 54.864,78.704 48.92,80.061 50.317,80.137 49.657,80.747 50.317,81.483 48.997,81.534 49.657,82.194 57.988,82.652 49.022,82.88 50.292,82.88 54.483,85.141 41.91,85.674 46.406,85.75 49.632,85.801 28.016,86.131 58.725,86.35 56.476,86.476 69.621,86.919 49.606,88.062 69.621,88.824 67.412,88.849 42.443,90.424 40.208,93.828 56.617,95.174 50.775,95.91 52.629,95.936 43.51,96.291 44.12,96.291 40.183,96.469 51.689,97.358 50.775,97.815 52.629,97.841 51.689,99.475 50.775,99.72 52.629,99.746 48.768,100.076 49.276,100.076 37.897,100.254 35.636,100.914 46.126,101.24 43.993,101.321 48.768,101.346 49.276,101.346 37.353,101.422 51.689,101.592 50.775,101.625 52.629,101.651 61.265,102.438 43.967,102.489 41.427,102.565 48.768,102.616 49.276,102.616 46.126,102.641 35.611,102.743 39.192,102.972 61.239,103.302 50.775,103.53 52.629,103.556 51.689,103.708 36.627,103.911 50.775,105.435 52.629,105.461 36.627,105.74 44.308,108.331 67.843,109.474 37.186,111.735 42.164,119.99
GND_5108: 0R.2 1kr.1 2.2uf.1 3.3nf.1 10k,'.2 10u'.2 10u.2 10uf''.2 10uf'.2 10uf,,.2 10uf_1,,.2 47uf.2 104''.2 104'.2 104,.2 104.2 BAT_4.2V_3.2 IP5108.2 IP5108.14 L.2 SI2302,'.2 USB_M_3.5 Vout_5V_3.2
  other v1: 30.165,36.347 42.85,37.084 48.539,37.16 54.331,37.44 30.089,38.506 35.636,39.243 38.202,39.487 41.326,39.563 57.099,40.538 30.048,41.199 67.285,44.186 70.307,44.211 57.582,44.389 64.211,44.389 61.239,44.44 49.225,46.279 51.283,48.768 32.385,49.505 32.664,50.927 31.14,51.003 69.555,51.257 52.095,51.46 47.32,51.775 45.009,51.801 42.799,51.994 52.019,52.324 33.401,52.349 35.839,52.68 58.649,53.391 57.785,53.416 53.823,53.467 55.753,53.467 51.638,53.543 54.788,54.077 56.617,54.077 57.76,54.102 52.883,54.127 51.638,54.661 53.848,54.762 55.753,54.813 53.365,56.083 53.289,56.845 63.729,60.3
GND_6500: 0,,.1 0,.1 22uf,'.1 47uf'.2 ,.3 NTC_2.1 RPot_1k'.1 SLM6500.1 USB_M_4.5
  other v1: 111.15,102.946 113.157,102.997 83.337,103.429 99.898,103.784 113.995,104.546 116.484,104.673 118.999,104.673 98.095,105.486 112.014,105.766 108.941,105.943 86.131,106.756 90.043,106.756 99.974,106.782 103.683,107.213 95.402,107.594 97.511,107.594 111.455,108.56 83.464,108.61 108.585,108.763 94.285,109.042 96.495,109.068 98.755,109.118 103.632,109.195 86.512,109.779 89.179,110.007 86.563,111.201 89.281,111.379 103.962,111.684 102.743,112.039 83.591,112.319 107.264,112.801 109.652,114.529 84.023,115.037 86.106,115.519 111.963,117.145 93.066,117.196 98.069,117.196 95.58,117.221 86.436,118.008 83.972,118.186 99.238,119.913 100.635,121.844 109.372,122.123 101.93,123.571
  other v3: 96.012,110.553 96.012,112.522 96.012,114.49
IRQ: I2C.1 IP5108.11 | length 25
  Bottom Layer w0.508: v1(57.161,56.879) ccw(c59.169,56.879) 57.749,55.459 59.225,53.982 ccw(c61.022,55.778) 61.022,53.238 75.58,53.238 cw(c75.58,50.698) 77.376,52.494 I2C.1@79.35,50.521
ISET: RPot_1k.2 RPot_1k.3 TP4302B.16 | length 18.5
  Bottom Layer w0.508: v1(54.483,105.156) 55.184,105.156 ccw(c55.184,106.283) 55.982,105.486 55.982,116.601 cw(c58.522,116.601) 56.726,118.397 56.965,118.636 cw(c58.761,116.84) 58.761,119.38 RPot_1k.2@60.249,119.38
KEY: 10k,.1 220R.2 IP5306.5 | length 25.2
  Top Layer w0.508: IP5306.5@52.426,79.68 52.469,79.636 cw(c50.673,77.84) 53.213,77.84 53.213,75.296 ccw(c55.753,75.296) 53.957,73.5 220R.2@54.204,73.254
  Bottom Layer w0.508: v1(52.375,79.68) 68.656,79.68 cw(c68.656,77.165) v1(70.434,78.943)
KEY_5108: IP5108.15 SI2302,'.3 | length 16.5
  Bottom Layer w0.508: v1(52.081,56.879) 52.827,57.625 cw(c54.623,55.829) 54.623,58.369 66.055,58.369 ccw(c66.055,60.909) v1(67.851,59.113)
L1: 3.3K,.2 I2C.3 IP5108.9 | length 25
  Top Layer w0.508: 58.318,60.3 58.957,59.661 ; 58.445,59.919 cw(c58.445,59.305) 58.879,59.739 ; 58.813,60.2 ccw(c59.35,60.055) 58.957,59.661 ; v1(59.701,56.879) 59.701,57.865 ccw(c57.161,57.865) 58.957,59.661
  Bottom Layer w0.508: v1(59.701,56.879) 60.235,56.345 ccw(c62.031,58.141) 62.031,55.601 I2C.3@79.35,55.601
L2: 3.3K.2 I2C.2 IP5108.10 | length 30
  Top Layer w0.508: 3.3K.2@53.416,60.35 54.564,59.203 ccw(c54.737,59.376) v1(54.737,59.131) ; v1(57.226,59.08) 57.726,58.581 cw(c56.024,56.879) v1(58.431,56.879) ; 58.112,58.07 ccw(c58.8,58.254) IP5108.10@58.443,57.637
  Bottom Layer w0.508: v1(54.737,59.131) 57.104,59.131 cw(c57.104,58.958) v1(57.226,59.08) ; v1(58.431,56.879) ccw(c59.887,56.879) 58.857,55.849 59.784,54.922 ccw(c61.58,56.718) 61.58,54.178 77.18,54.178 cw(c77.18,51.638) 78.976,53.434 I2C.2@79.35,53.061
LIGHT: 220R,.2 IP5108.8 | length 5.3
  Top Layer w0.762: IP5108.8@59.701,51.291 59.701,50.805 ccw(c60.965,50.805) 60.071,49.911 60.187,49.911 ccw(c60.187,52.451) 61.983,50.655 62.662,51.333 ; 62.011,50.683 ccw(c61.361,51.333) 62.281,51.333
LX: "1uH/5A SMD,.1" IP5108.3 IP5108.4
Net0.5R_1: 0.5R.1 22uf,_.1 "1uH/5A SMD.2" BAT_4.2V_2.1 | length 15.5
  Top Layer w1.016: 0.5R.1@57.633,78.334 57.633,76.516 ccw(c60.173,76.516) 58.377,74.719 59.581,73.515 ccw(c61.377,75.311) 61.377,72.771 BAT_4.2V_2.1@63.5,72.771 63.5,77.612 cw(c64.801,77.612) 63.881,78.532
Net0.5R_2: 0.5R.2 22uf,,_.1 IP5306.6 | length 5.3
  Top Layer w1.016: IP5306.6@52.426,80.95 cw(c52.476,80.899) 52.476,80.971 53.979,80.971 ccw(c54.864,81.855) 54.864,80.604 cw(c54.901,80.568) 54.901,80.62 0.5R.2@57.633,80.62
Net0.25R_1: 0.25R.1 1.5R.2 1K.2 10uf_1.1 TP4302B.6 | length 10.3
  Bottom Layer w1.27: 0.25R.1@39.37,98.984 v1@49.657,98.984
  other v1: 48.133,98.821 48.908,98.821 49.682,98.821
Net0.25R_2: 0.25R.2 "Fuse 2A 8V.2"
  other v1: 33.477,93.396 34.468,93.701 33.782,94.285 34.9,94.666
Net0.067_2: 0.067.2 3.3uH/5A.2 SLM6500.7 | length 19
  Top Layer w1.016: SLM6500.7@98.755,113.233 104.335,113.233 3.3uH/5A.2@105.207,114.105 ; 0.067.2@105.207,109.093 3.3uH/5A.2@105.207,114.105 ; 105.207,112.131 cw(c108.292,112.131) 3.3uH/5A.2@106.11,114.313 ; 3.3uH/5A.2@105.271,114.661 cw(c104.083,114.661) 104.923,113.821 cw(c105.763,112.981) 3.3uH/5A.2@105.763,114.169 ; 3.3uH/5A.2@107.247,116.146 3.3uH/5A.2@105.207,114.105
Net1.5k_2: 1.5k.2 V1.1 V2.1 V_good.1 | length 27.1
  Top Layer w0.254: 1.5k.2@119.771,76.369 ccw(c118.044,78.232) V1.1@120.584,78.232 ; 1.5k.2@119.944,76.183 ccw(c118.583,77.65) V1.1@120.584,77.65 ; 1.5k.2@119.99,75.997 120.584,76.591 V1.1@120.584,78.232 ; 1.5k.2@120.117,75.997 ccw(c119.123,77.068) 120.584,77.068 ; V1.1@120.131,77.871 cw(c119.114,77.283) 120.248,76.979 ; V1.1@120.203,77.774 cw(c119.557,77.166) 120.419,76.96 ; V1.1@120.214,77.762 cw(c119.321,76.869) 120.584,76.869 cw(c121.847,76.869) V1.1@120.954,77.762 ; V1.1@120.214,78.702 ccw(c119.321,79.595) 120.584,79.595 ccw(c121.847,79.595) V1.1@120.954,78.702 ; V2.1@120.214,79.959 cw(c119.321,79.066) 120.584,79.066 cw(c121.847,79.066) V2.1@120.954,79.959 ; V2.1@120.214,80.899 ccw(c119.321,81.792) 120.584,81.792 ccw(c121.847,81.792) V2.1@120.954,80.899 ; V_good.1@120.214,82.156 cw(c119.321,81.264) 120.584,81.264 cw(c121.847,81.264) V_good.1@120.954,82.156 ; 120.232,76.918 cw(c121.396,76.607) V1.1@120.83,77.67 ; 1.5k.2@120.289,75.811 ccw(c119.663,76.486) 1.5k.2@120.584,76.486 ; V1.1@120.383,77.483 cw(c121.02,77.313) V1.1@120.71,77.895 ; V1.1@120.388,77.948 cw(c119.968,77.553) 120.529,77.419 ; 120.462,77.141 cw(c121.318,76.936) V1.1@120.858,77.686 ; V_good.1@120.584,82.626 V2.1@120.584,80.429 V1.1@120.584,78.232
Net1.5R_1: 1.5R.1 10uf.1 | length 2.7
  Bottom Layer w0.762: 10uf.1@39.253,101.422 ccw(c39.436,101.422) 39.436,101.24 1.5R.1@41.808,101.24
Net1.8nf_2: 1.8nf.2 40.2K.1 | length 10
  Top Layer w0.254: 1.8nf.2@92.177,85.562 94.143,85.562 40.2K.1@94.412,85.293 ; 1.8nf.2@92.408,85.562 cw(c92.408,83.417) 40.2K.1@93.926,84.934 ; 1.8nf.2@92.581,85.137 cw(c93.165,84.322) 93.424,85.29 cw(c93.72,86.394) 1.8nf.2@92.73,85.824 ; 1.8nf.2@92.646,85.193 cw(c93.539,84.3) 93.539,85.562 cw(c93.539,86.825) 1.8nf.2@92.646,85.932 ; 93.022,85.562 cw(c93.022,84.03) 40.2K.1@94.105,85.114 ; 93.635,85.562 cw(c93.635,84.643) 40.2K.1@94.285,85.293 ; 40.2K.1@93.708,85.562 ccw(c93.708,85.87) 40.2K.1@93.926,85.652
Net1K,'_2: 1K,'.2 GREEN.1 RED.1 | length 13
  Top Layer w0.508: 87.3,103.251 91.628,103.251 GREEN.1@91.719,103.342 RED.1@94.31,103.342 ; 87.569,102.982 cw(c88.22,102.331) 88.22,103.251 cw(c88.22,104.171) 87.569,103.52 ; 90.443,103.251 ccw(c90.443,104.519) GREEN.1@91.339,103.622 ; 90.884,103.251 cw(c90.884,102.607) GREEN.1@91.339,103.062 ; GREEN.1@92.099,103.062 cw(c92.775,102.386) 92.775,103.342 cw(c92.775,104.298) GREEN.1@92.099,103.622 ; RED.1@93.93,103.062 ccw(c93.254,102.386) 93.254,103.342 ccw(c93.254,104.298) RED.1@93.93,103.622
Net1K,,_2: 1K,,.2 22uf,,,.1 22uf,,.1 22uf,.1 IP5306.8 Vout_5V_2.1 | length 25.9
  Top Layer w0.508: Vout_5V_2.1@62.154,87.859 62.832,87.18 ccw(c64.628,88.976) 64.628,86.436 66.842,86.436 cw(c66.842,83.896) 68.638,85.692 cw(c68.104,85.158) 68.859,85.158 ccw(c70.679,85.158) 69.392,83.871 70.46,82.804
  Top Layer w1.016: IP5306.8@52.426,83.49 52.426,85.689 cw(c54.966,85.689) 53.17,87.485 53.19,87.506 cw(c54.987,85.71) 54.987,88.25 58.725,88.25 61.209,88.25 ; 52.426,84.435 cw(c53.427,84.435) 52.719,85.144 ; Vout_5V_2.1@61.93,87.767 ccw(c61.209,87.471) 61.209,88.25 ; Vout_5V_2.1@62.154,87.859 ccw(c61.209,86.914) 61.209,88.25
Net1K_1__2: 1K_1_.2 RPot_1k.1 | length 4
  Top Layer w0.508: RPot_1k.1@62.789,119.38 66.741,119.38 cw(c66.741,119.293) 1K_1_.2@66.802,119.355
"Net1uH/5A SMD_1": "1uH/5A SMD.1" IP5306.7 | length 13.9
  Top Layer w1.016: IP5306.7@52.426,82.22 53.31,82.22 ccw(c53.31,84.561) 54.966,82.906 55.548,83.488 cw(c57.344,81.692) 57.344,84.232 63.881,84.232 ; 61.433,83.884 ccw(c60.593,83.044) 60.593,84.232 ccw(c60.593,85.419) 61.433,84.579
Net2R,_1: 2R,.1 10uf,,.1 | length 2.5
  Top Layer w1.016: 40.005,55.26 cw(c39.944,55.199) 40.03,55.199 40.03,52.73
Net2R_1: 2R.1 10uf,.1 | length 2.6
  Top Layer w1.016: 2R.1@39.929,81.407 39.929,79.108 ccw(c40.362,79.108) 40.056,78.801
Net2R_2: 2R.2 10uf_1,.1 "Fuse 2A 8V,.2" IP5306.1
Net3.3uH/5A_1: 3.3uH/5A.1 SLM6500.8 | length 9.4
  Top Layer w1.016: SLM6500.8@98.755,114.503 98.755,115.714 3.3uH/5A.1@103.217,120.176 ; 3.3uH/5A.1@101.24,118.691 cw(c100.052,118.691) 100.892,117.851 cw(c101.732,117.011) 3.3uH/5A.1@101.732,118.199
Net4k_1: 4k.1 100uf.2 555.2 555.6 | length 11.5
  Top Layer w0.508: 555.2@34.061,111.684 35.636,111.684 36.83,110.49 4k.1@42.215,110.49 42.408,110.297 100uf.2@42.408,108.331 ; 38.632,110.49 cw(c38.632,110.107) 555.6@38.902,110.378 ; 555.6@40.397,110.378 cw(c40.667,110.107) 40.667,110.49
Net4k_2: 4k.2 135k.2 555.7 | length 7.8
  Top Layer w0.508: 555.7@39.649,111.684 43.282,111.684 135k.2@44.501,112.903 4k.2@44.501,110.49
Net10k,'_1: 10k,'.1 En_auto_Display_3.1 SI2302,'.1 | length 14.9
  Top Layer w0.508: 66.837,55.083 ccw(c66.187,55.733) 67.107,55.733 ccw(c68.027,55.733) 67.376,55.083 ; 66.933,56.751 cw(c66.512,56.331) 67.107,56.331 ; 67.071,56.915 cw(c66.985,56.829) 67.107,56.829 67.107,54.813 ccw(c68.701,54.813) 67.574,53.686 ccw(c68.961,55.073) 68.961,53.111 70.169,53.111 ccw(c70.169,55.651) 71.966,53.855 72.078,53.968 ccw(c70.282,55.764) 72.822,55.764 ; En_auto_Display_3.1@72.498,56.469 cw(c71.891,55.764) 72.822,55.764 ; En_auto_Display_3.1@72.822,56.845 72.822,55.764 ; En_auto_Display_3.1@73.145,56.469 ccw(c73.753,55.764) 72.822,55.764
Net10k,_2: 10k,.2 SI2302,.3 | length 3
  Top Layer w0.508: 70.346,74.592 ccw(c70.012,74.927) 70.485,74.927 ccw(c70.958,74.927) 70.624,74.592 ; 70.434,76.657 cw(c70.312,76.535) 70.485,76.535 70.485,74.429
Net10k,__1: 10k,_.1 En_auto_Display_2.1 SI2302,.1 | length 15.3
  Top Layer w0.508: v1@69.396,71.915 cw(c69.062,71.58) 69.535,71.58 cw(c70.008,71.58) 69.674,71.915 ; v1@69.446,72.049 ccw(c69.777,71.948) 69.477,71.775 ; 69.494,69.977 ccw(c69.396,70.075) 69.535,70.075 v1@69.535,72.079
  Bottom Layer w0.508: v1(69.494,72.034) 74.288,76.828 ccw(c72.492,78.624) 75.032,78.624 En_auto_Display_2.1@75.032,82.017
Net10k_1: 10k.1 En_auto_Display.1 SI2302.1 | length 20.2
  Top Layer w0.508: En_auto_Display.1@48.057,109.88 52.019,109.88 v1(56.718,105.181)
  Bottom Layer w0.508: v1(56.718,105.181) 58.903,105.181 60.122,103.962 60.122,102.921 10k.1@56.845,99.644
Net10K__1: 10K_.1 555_spot_low.2 Signal_IN.2 | length 4.5
  Top Layer w0.508: Signal_IN.2@33.884,122.784 ccw(c35.539,124.439) 35.539,122.098 v1(38.202,122.098)
Net10nf'_1: 10nf'.1 LTC3118.23 | length 8.3
  Top Layer w0.254: 10nf'.1@97.307,97.521 98.059,97.521 ; 10nf'.1@97.415,97.508 cw(c97.73,96.978) 98.166,97.414 ; 10nf'.1@97.545,97.29 cw(c97.902,96.688) 98.397,97.183 ; 10nf'.1@97.675,97.071 cw(c98.075,96.398) 98.628,96.952 ; 10nf'.1@97.918,97.407 cw(c98.059,97.376) 98.059,97.521 ; 10nf'.1@97.918,97.634 ccw(c98.059,97.665) 98.059,97.521 ; LTC3118.23@99.63,93.741 99.63,94.401 98.628,95.402 98.628,96.952 ; 98.059,97.521 98.628,96.952
Net10nf'_2: 10nf'.2 LTC3118.24 | length 5.8
  Top Layer w0.254: 10nf'.2@97.307,95.621 97.307,95.563 LTC3118.24@99.13,93.741 ; 10nf'.2@97.407,95.098 cw(c97.407,94.215) 98.032,94.839 ; 10nf'.2@97.676,95.621 ccw(c98.706,95.621) 97.978,94.893 ; 10nf'.2@97.93,95.621 ccw(c99.573,95.621) 98.412,94.459 ; 98.749,94.121 ccw(c99.13,94.502) LTC3118.24@99.13,93.964
Net10nf,_1: 10nf,.1 LTC3118.19 | length 6.5
  Top Layer w0.254: LTC3118.19@101.93,92.741 102.073,92.741 104.546,95.214 ; LTC3118.19@102.153,92.741 cw(c102.347,92.741) 102.21,92.878 ; 103.483,94.151 ccw(c102.419,95.214) 103.923,95.214 ; 103.724,94.392 cw(c104.446,93.67) 104.446,94.691 ; 103.916,94.584 ccw(c103.287,95.214) 104.177,95.214
Net10nf,_2: 10nf,.2 LTC3118.20 | length 8.3
  Top Layer w0.254: LTC3118.20@101.13,93.741 101.869,93.741 103.276,95.148 103.276,96.571 ; 103.502,96.796 cw(c103.959,96.339) 104.303,96.887 ; 103.727,97.021 cw(c104.133,96.615) 104.438,97.102 ; 104.168,96.671 ccw(c103.785,96.062) 103.276,96.571 ; 104.546,97.114 103.82,97.114 103.276,96.571
Net10nf_2: 10nf.2 555.5 | length 3.7
  Top Layer w0.508: 10nf.2@39.507,107.391 40.691,108.575 40.691,108.89 40.437,109.144 555.5@39.649,109.144 ; 555.5@40.356,109.093 cw(c40.323,108.727) 40.691,108.727
Net10nf__2: 10nf_.2 555_spot_low.5
  other v1: 43.79,119.558
Net10uf_3_1: 10uf_3.1 10uf_4.1 Switch.2 TP4302B.14
Net10uf_3_2: 10uf_3.2 TP4302B.13 Vout_5V.2
Net20k_1: 20k.1 100uf_.2 555_spot_low.6 555_spot_low.7 | length 6.8
  Top Layer w0.508: 555_spot_low.7@43.79,122.098 555_spot_low.6@43.79,120.828 v1(46.355,120.828)
  Bottom Layer w0.508: 20k.1@46.203,123.393 46.203,121.103 ccw(c46.289,121.103) 100uf_.2@46.228,121.041 ; 100uf_.2@46.203,121.073 ccw(c46.6,121.073) 46.319,120.792 cw(c46.6,121.073) 100uf_.2@46.203,121.073
Net22pf_2: 22pf.2 40.2K.2 LTC3118.8 | length 12.5
  Top Layer w0.254: 22pf.2@96.313,87.135 cw(c95.383,86.205) 96.698,86.205 ; 40.2K.2@96.339,85.652 ccw(c95.471,86.52) 96.698,86.52 ccw(c97.924,86.52) 40.2K.2@97.057,85.652 ; 22pf.2@96.492,87.314 cw(c95.996,86.818) 96.698,86.818 ; 22pf.2@96.683,87.974 ccw(c96.683,88.864) 22pf.2@97.313,88.235 ; 22pf.2@96.683,88.228 ccw(c96.683,89.732) 97.746,88.668 ; 40.2K.2@96.698,85.293 96.698,87.589 22pf.2@96.683,87.605 98.019,88.941 LTC3118.8@99.13,88.941 ; 96.698,86.279 cw(c97.909,86.279) 22pf.2@97.052,87.135 ; 22pf.2@97.206,87.705 cw(c98.227,87.705) 97.505,88.427
Net30R_1: 30R.1 100ma_LED.1 | length 4.5
  Bottom Layer w0.508: 100ma_LED.1@59.03,93.675 100ma_LED.1@59.157,93.548
  Bottom Layer w1.016: 100ma_LED.1@59.03,93.675 30R.1@59.03,97.206 ; 59.03,94.439 ccw(c60.047,94.439) 100ma_LED.1@59.328,93.719
Net30R_2: 30R.2 TP4302B.12 | length 4.9
  Bottom Layer w1.016: v1(54.026,100.076) 54.762,100.076 55.118,99.72 55.118,98.019 55.931,97.206 30R.2@56.744,97.206
  other v1: 54.94,100.051
Net47nf,_2: 47nf,.2 LTC3118.21 | length 6.3
  Top Layer w0.254: LTC3118.21@100.63,93.741 100.63,94.712 102.057,96.139 102.057,96.357 ; 100.839,94.921 ccw(c99.403,96.357) 101.434,96.357 ; 101.273,95.355 ccw(c100.27,96.357) 101.688,96.357 ; 101.608,95.69 cw(c101.957,95.34) 101.957,95.834
Net47nf_2: 47nf.2 LTC3118.22 | length 5.2
  Top Layer w0.254: 47nf.2@99.732,95.988 cw(c98.77,95.026) 100.13,95.026 ; 47nf.2@99.911,96.167 cw(c99.383,95.639) 100.13,95.639 ; 47nf.2@100.101,96.357 100.13,96.329 LTC3118.22@100.13,93.741 ; 100.13,95.164 cw(c101.295,95.164) 47nf.2@100.471,95.988
Net220R,_1: 220R,.1 L.1 | length 3.3
  Top Layer w0.762: 64.948,51.333 67.471,51.333 cw(c67.471,51.073) L.1@67.655,51.257 ; 66.949,51.333 ccw(c66.949,52.064) L.1@67.465,51.547
Net220R_1: 220R.1 L5.1 | length 2.4
  Top Layer w0.508: L5.1@54.179,68.59 ccw(c54.119,68.65) 54.204,68.65 220R.1@54.204,70.968
Net555_spot_low_3: 555_spot_low.3 Spot_point.2 | length 14.6
  Top Layer w0.508: 555_spot_low.3@38.202,120.828 38.648,120.828 cw(c38.648,118.288) 40.444,120.084 41.547,118.981 ccw(c43.343,120.777) 43.343,118.237 45.125,118.237 ccw(c45.125,120.777) 46.921,118.981 Spot_point.2@50.317,122.377
Net,_2: ,.2 NTC_1.1 RPot_1k'.2 SLM6500.5 | length 41.8
  Top Layer w0.508: SLM6500.5@98.755,110.693 v1(100.559,110.693)
  Bottom Layer w0.508: v1(100.559,110.693) 115.291,110.693 RPot_1k'.2@115.824,111.227 ; 113.701,110.693 ccw(c113.701,113.35) RPot_1k'.2@115.579,111.471 ; 114.927,110.693 ccw(c114.927,112.123) RPot_1k'.2@115.939,111.112 ; RPot_1k'.2@115.824,110.881 cw(c115.824,110.045) 116.415,110.636 cw(c117.005,111.227) 116.17,111.227 cw(c117.005,111.227) 116.415,111.817 cw(c115.824,112.408) RPot_1k'.2@115.824,111.573 ; NTC_1.1@121.442,106.304 ccw(c120.596,105.457) 120.596,106.655 ccw(c120.596,107.852) NTC_1.1@121.442,107.005 ; 121.442,113.39 ccw(c120.596,112.544) 120.596,113.741 ccw(c120.596,114.939) 121.442,114.092 ; NTC_1.1@121.793,106.655 120.396,106.655 RPot_1k'.2@115.824,111.227 ; 121.793,113.741 118.339,113.741 RPot_1k'.2@115.824,111.227
NetGREEN_2: GREEN.2 SLM6500.3 | length 10.6
  Top Layer w0.508: GREEN.2@91.439,105.522 ccw(c90.763,106.198) 91.719,106.198 ccw(c92.675,106.198) GREEN.2@91.999,105.522 ; GREEN.2@91.719,105.242 91.719,108.28 90.729,109.271 90.729,111.227 91.465,111.963 SLM6500.3@93.167,111.963
NetIP5306_2: IP5306.2 L1,.1 L2,.2 | length 18.7
  Top Layer w0.508: 41.808,70.062 44.247,70.062 cw(c44.247,69.2) v1(44.856,69.809)
  Bottom Layer w0.508: v1(44.856,69.809) 44.856,74.843 ccw(c42.316,74.843) 44.112,76.639 43.772,76.98 cw(c45.568,78.776) 43.028,78.776 43.028,79.618 cw(c45.568,79.618) 43.772,81.414 43.858,81.501 cw(c45.655,79.705) 45.655,82.245 v1(46.812,82.245)